# Altium PCB Mini_CS.PcbDoc
Units mm, origin at the board's own origin, x right, y up, seen from the top; angles counter-clockwise.
Board outline 22.1 x 55.3 mm, 4 copper layers (Top Layer, Ground Plane, Power Plane, Bottom Layer), stack 0.778 mm thick; 50 components, 60 nets, 288 pads, 86 vias.
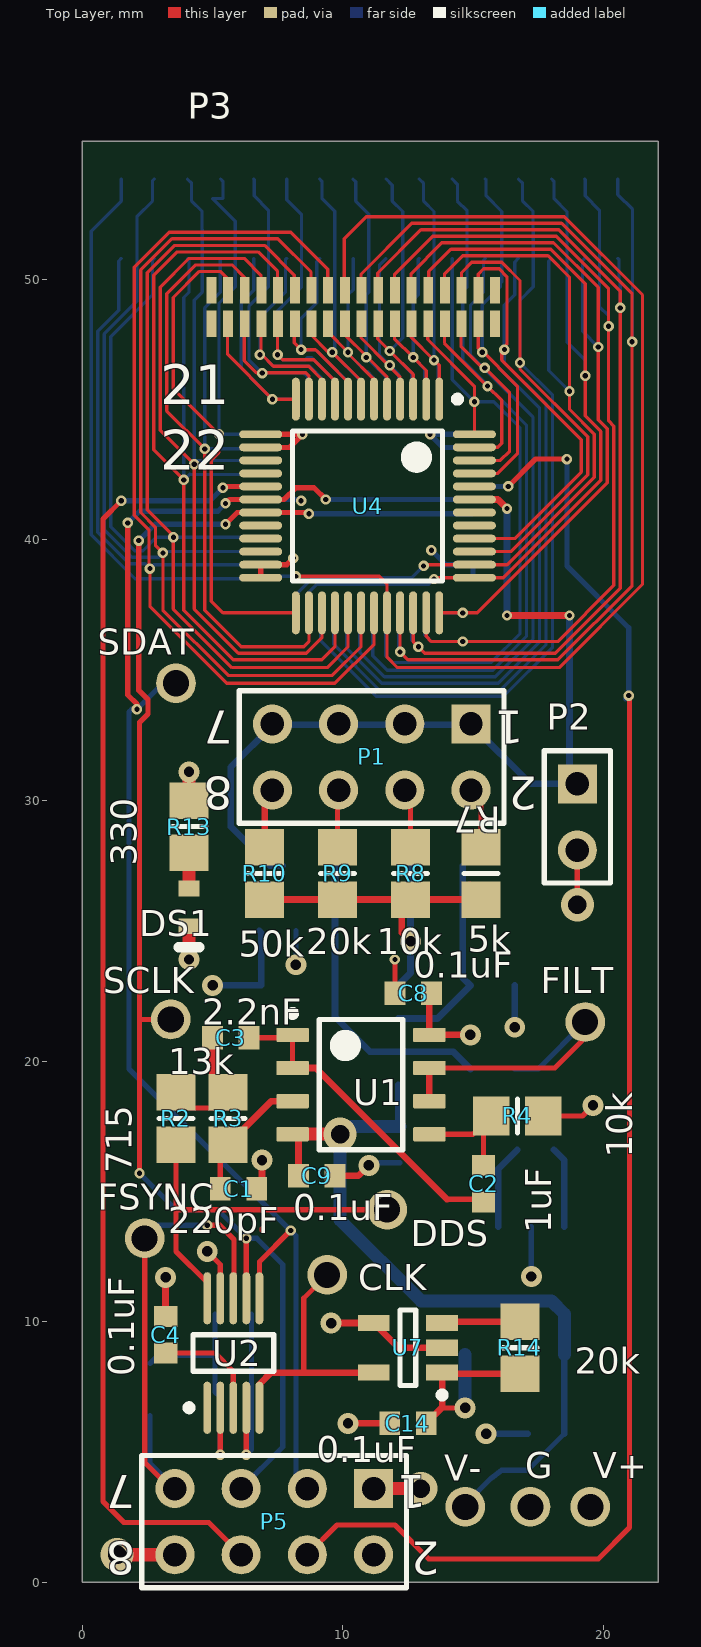
[diagram p0: Top Layer view]
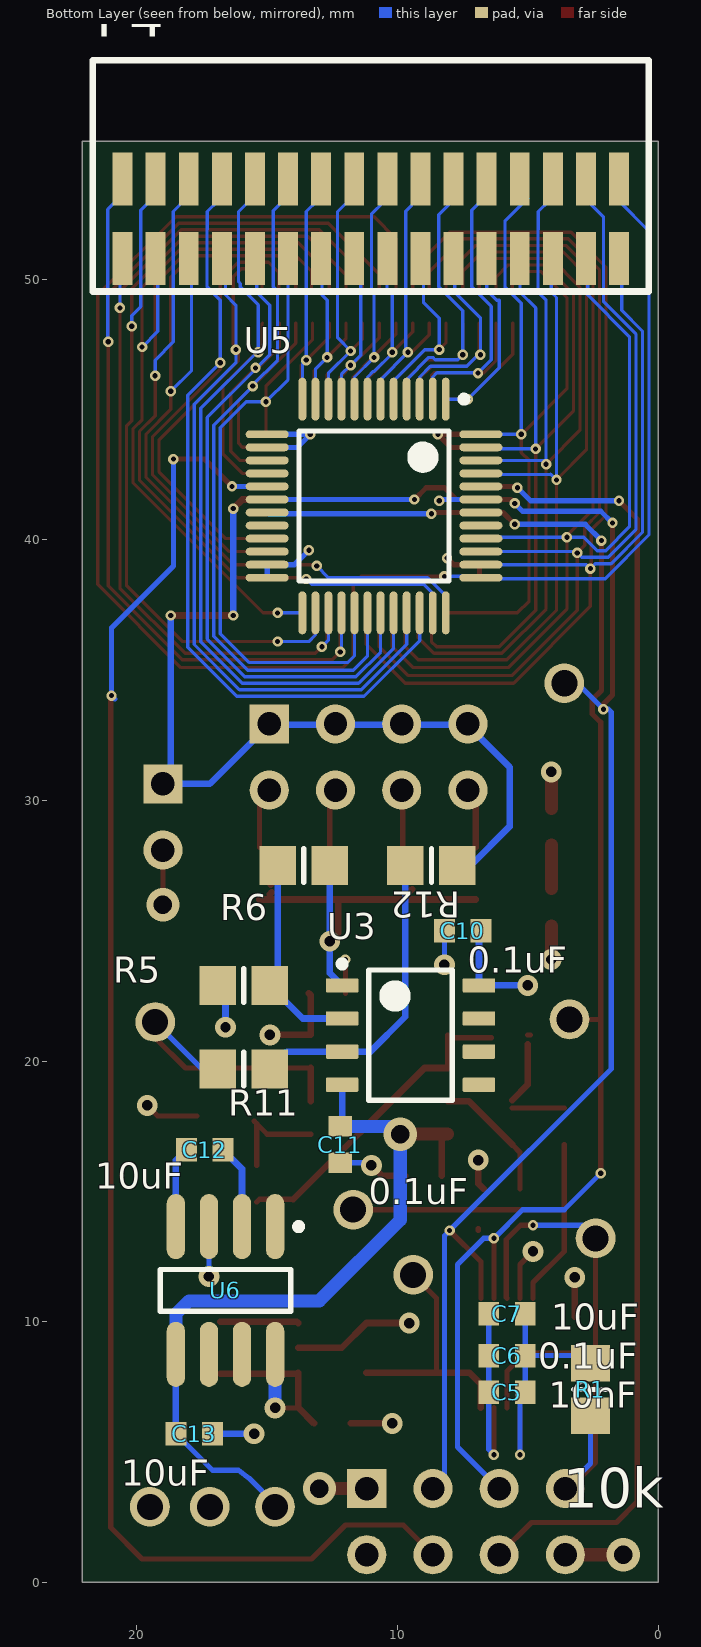
[diagram p1: Bottom Layer view, seen from below]
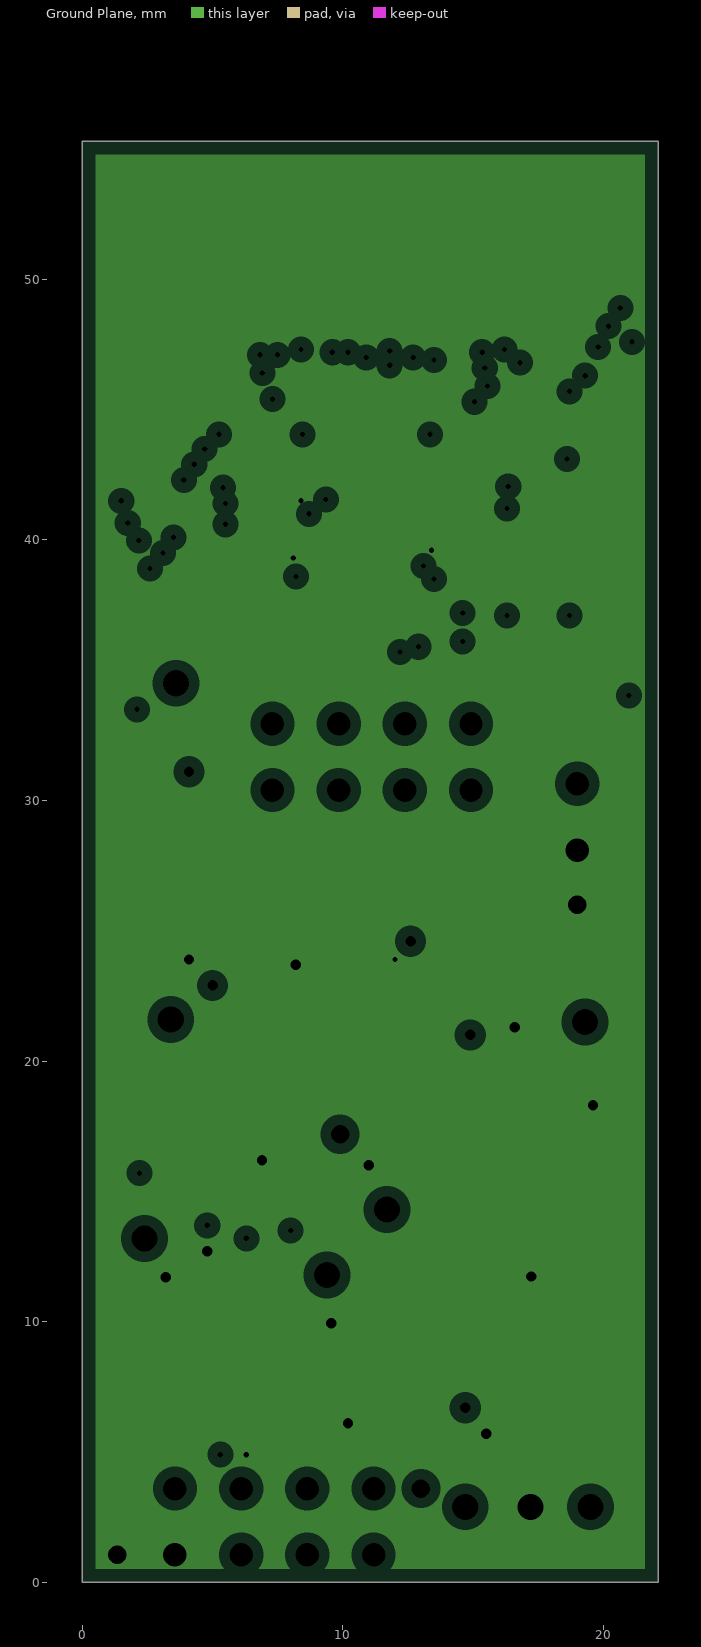
[diagram p2: Ground Plane, clearances drawn from the general rule]
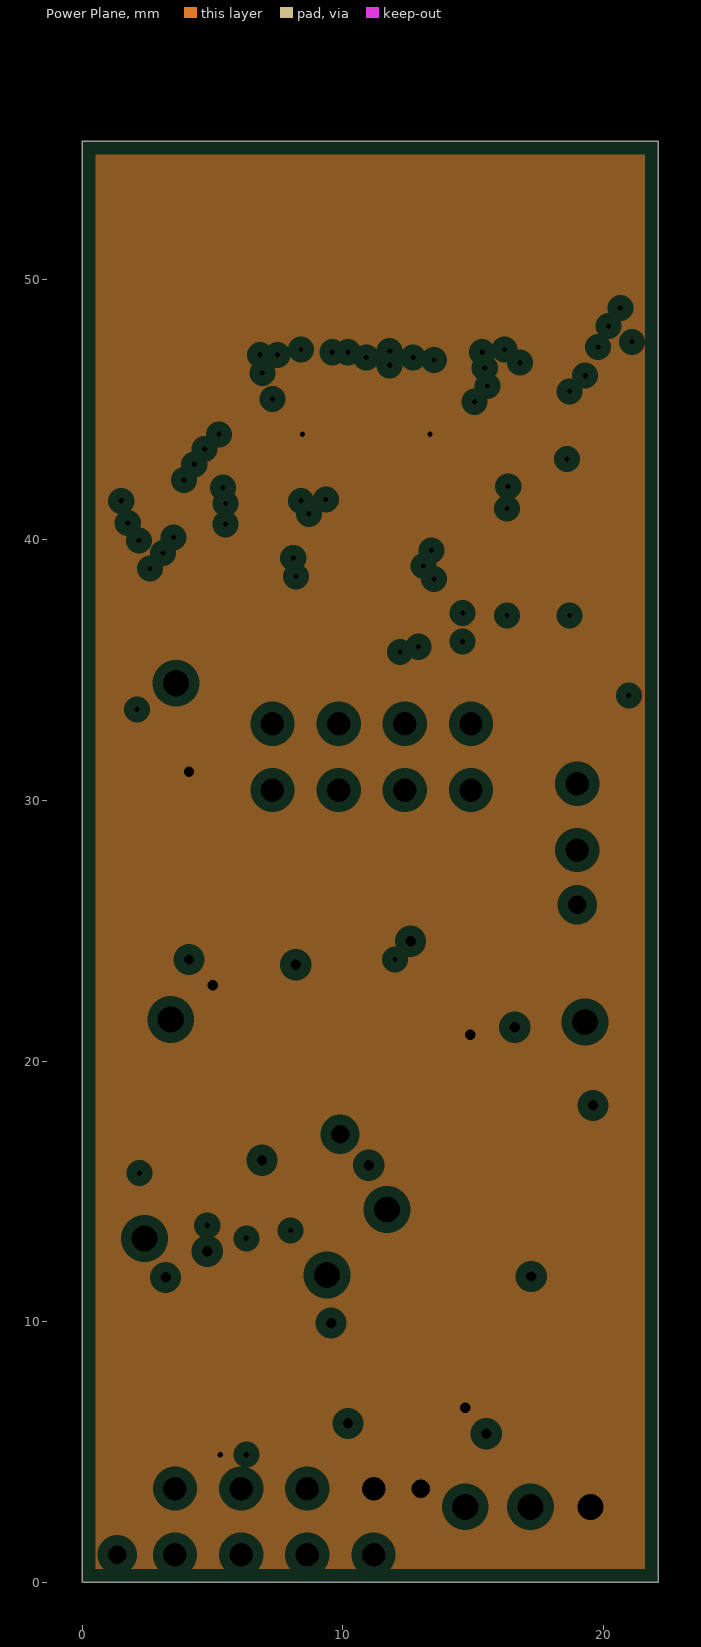
[diagram p3: Power Plane, clearances drawn from the general rule]

## Layer stack, top to bottom
Top Solder: solder mask 0.0102, Solder Resist, Dk 3.5
Top Layer: signal copper 0.0356
Dielectric 1: core 0.254, FR-4, Dk 4.2
Ground Plane: plane copper 0.036, net GND
Dielectric 3: prepreg 0.127, Dk 4.2
Power Plane: plane copper 0.036, net V+
Dielectric 2: core 0.254, Dk 4.2
Bottom Layer: signal copper 0.0356
Bottom Solder: solder mask 0.0102, Solder Resist, Dk 3.5

## Board outline
22.1,55.3 0,55.3 0,0 22.1,0

## Design rules (kind name [scope] priority, off if disabled: settings)
Clearance [All] p1: gap=0.125 ignorepadtopadclearanceinfootprint=FALSE except(0: Arc-Hole Track-Hole SMDPad-Hole THPad-Hole Via-Hole Fill-Hole Poly-Hole Region-Hole Text-Hole)
PlaneClearance [All] p1: clearance=0.4
PlaneConnect [All] p1: planeconnectstyle=Direct reliefexpansion=0.508 reliefentries=4 reliefconductorwidth=0.254 reliefairgap=0.254
PolygonConnect [All] p1: connectstyle=Relief reliefconductorwidth=0.254 reliefentries=4 polygonreliefangle="90 Angle" airgapwidth=0.254
RoomDefinition Power_Supply_and_Buttons [InComponentClass('Power_Supply_and_Buttons')] p1: confinementstyle=ConfineIn formatcopy=TRUE lockcomponents=FALSE outline 24.343,39.394 81.493,39.394 81.493,51.713 24.343,51.713
RoomDefinition adg731-switches [InComponentClass('adg731-switches')] p2: confinementstyle=ConfineIn formatcopy=TRUE lockcomponents=FALSE outline 24.343,30.6 30,30.6 30,38.124 24.343,38.124
RoomDefinition AD9833_Single_Ended [InComponentClass('AD9833_Single_Ended')] p3: confinementstyle=ConfineIn formatcopy=TRUE lockcomponents=FALSE outline -21.061,-5.4 -16.5,-5.4 -16.5,-2.098 -21.061,-2.098
RoutingVias [All] p1: holewidth=0.4 width=0.8 viastyle="Through Hole" minholewidth=0.2 minwidth=0.4 maxholewidth=0.711 maxwidth=1.27
SolderMaskExpansion [All] p1: expansion=0.102
Width [All] p1: maxlimit=0.5 minlimit=0.125 preferedwidth=0.2
28 further rules are at their usual default settings.

## Classes and differential pairs
net class SYNC[1..2]: SYNC1 SYNC2
component class Power_Supply_and_Buttons: C12 C13 C14 DS1 G P5 R13 R14 TP8 TP11 TP13 U6 U7 V+ V-
component class adg731-switches: P3 P4 U4 U5
component class AD9833_Single_Ended: C1 C2 C3 C4 C5 C6 C7 C8 C9 C10 C11 CLK DDS FILT FSYNC P1 P2 R1 R2 R3 R4 R5 R6 R7 R8 R9 R10 R11 R12 SCLK SDAT TP1 TP2 TP3 TP4 TP5 TP6 U1 U2 U3

## Components (designator, comment, footprint, x,y, rotation, side; value= is the part's Value field where it differs from the comment)
C1 "220pF" 1608[0603] 6,15.1 r180 top
C2 "1uF" 1608[0603] 15.4,15.3 r90 top
C3 "2.2nF" 1608[0603] 5.7,20.9 r180 top
C4 "0.1uF" 1608[0603] 3.2,9.5 r270 top
C5 "10nF" 1608[0603] 5.8,7.3 r180 bottom
C6 "0.1uF" 1608[0603] 5.8,8.7 r180 bottom
C7 "10uF" 1608[0603] 5.8,10.3 r180 bottom
C8 "0.1uF" 1608[0603] 12.7,22.6 r0 top
C9 "0.1uF" 1608[0603] 9,15.6 r180 top
C10 "0.1uF" 1608[0603] 7.5,25 r180 bottom
C11 "0.1uF" 1608[0603] 12.2,16.8 r90 bottom
C12 "10uF" 1608[0603] 17.4,16.6 r180 bottom
C13 "10uF" 1608[0603] 17.8,5.7 r0 bottom
C14 "0.1uF" 1608[0603] 12.5,6.1 r0 top
CLK "TESTPOINT_WHITE" TestPointVia 9.4,11.8 r180 top
DDS "TESTPOINT_WHITE" TestPointVia 11.7,14.3 r180 top
DS1 "TLMS1100-GS08" VISH-TLMX1100_V 4.1,25.9 r270 top
FILT "TESTPOINT_WHITE" TestPointVia 19.3,21.5 r180 top
FSYNC "TESTPOINT_WHITE" TestPointVia 2.4,13.2 r90 top
G "TESTPOINT_WHITE" TestPointVia 17.2,2.9 r90 top
P1 "Header 4X2" HDR2X4 14.92,32.94 r180 top
P2 "Header 2" HDR1X2 19,30.64 r270 top
P3 "MHDR2X18" A79025-001 4.96,48.3 r0 top
P4 "Header 16X2" FTSH-117-XX-XXX-DH 10.39,56.642 r180 bottom
P5 "Header 4X2" HDR2X4 11.18,3.6 r180 top
R1 "10k" 6-0805_M 2.6,7.4 r90 bottom
R2 "715" 6-0805_M 3.6,17.8 r90 top
R3 "13k" 6-0805_M 5.6,17.8 r270 top
R4 "10k" 6-0805_M 16.7,17.9 r180 top
R5 "0.1%" 6-0805_M 15.9,22.9 r180 bottom value=100K
R6 "0.1%" 6-0805_M 13.6,27.5 r180 bottom value=100K
R7 "5k" 6-0805_M 15.3,27.2 r270 top value=50k
R8 "10k" 6-0805_M 12.6,27.2 r90 top value=20k
R9 "20k" 6-0805_M 9.8,27.2 r90 top value=10k
R10 "50k" 6-0805_M 7,27.2 r90 top value=5k
R11 "0.1%" 6-0805_M 15.9,19.7 r180 bottom value=100K
R12 "0.1%" 6-0805_M 8.7,27.5 r180 bottom value=100K
R13 "330" 6-0805_M 4.1,29 r90 top
R14 "20k" 6-0805_M 16.8,9 r90 top
SCLK "TESTPOINT_WHITE" TestPointVia 3.4,21.6 r180 top
SDAT "TESTPOINT_WHITE" TestPointVia 3.6,34.5 r180 top
U1 "OPA2188AIDR" D0008A_L 10.7,19.1 r0 top
U2 "AD9833BRMZ" ADI-RM-10_M 5.8,8.8 r90 top
U3 "OPA2188AIDR" D0008A_L 9.5,21 r180 bottom
U4 "ADG731BSUZ" ADI-SU-48_N 10.95,41.3 r270 top
U5 "ADG731BSUZ" ADI-SU-48_N 10.9,41.3 r270 bottom
U6 "LTC1044ACS8" LT-S8-8_M 16.6,11.2 r270 bottom
U7 "LTC6900IS5#PBF" LT-TSOT-23-5_V 12.5,9 r180 top
V+ "TESTPOINT_WHITE" TestPointVia 19.5,2.9 r90 top
V- "TESTPOINT_WHITE" TestPointVia 14.7,2.9 r90 top

## Footprints (in the part's own frame and the unit in brackets; to place one, negate y for a bottom-side part, rotate by r counter-clockwise, add the part's x,y. Pads: shape width x height; smd on the part's side, far side on the other; paste and mask are expansions set on the pad)
6-0805_M [mm] "Chip Resistor, Body 2.0x1.2mm, IPC Low Density"
  rect 1.4x1.5 smd: 1(-1,0) 2(1,0)
  silkscreen extent 0,-0.65 0,0.65, body extent -1.07,-0.7 1.07,0.7, height 0.7
1608[0603] [mm] "Chip Capacitor, Body 1.6x0.8mm, IPC High Density"
  rect 0.8x0.9 smd: 1(-0.7,0) 2(0.7,0)
  body extent -0.87,-0.48 0.87,0.48, height 1.3
A79025-001 [mm]
  rect 0.38x1.02 smd: 1(0,0) 2(0.64,0) 3(1.28,0) 4(1.92,0) 5(2.56,0) 6(3.2,0) 7(3.84,0) 8(4.48,0) 9(5.12,0) 10(5.76,0) 11(6.4,0) 12(7.04,0) 13(7.68,0) 14(8.32,0) 15(8.96,0) 16(9.6,0) 17(10.24,0) 18(10.88,0) 19(0,1.28) 20(0.64,1.28) 21(1.28,1.28) 22(1.92,1.28) 23(2.56,1.28) 24(3.2,1.28) 25(3.84,1.28) 26(4.48,1.28) 27(5.12,1.28) 28(5.76,1.28) 29(6.4,1.28) 30(7.04,1.28) 31(7.68,1.28) 32(8.32,1.28) 33(8.96,1.28) 34(9.6,1.28) 35(10.24,1.28) 36(10.88,1.28)
  body extent -1.1,-0.29 11.98,7.15, height 1.9
ADI-RM-10_M [mm] "TSSOP, 10-Leads, Body 3x3mm, Pitch 0.5mm, IPC Low Density"
  oval 2x0.3 smd: 1(-2.1,1) 2(-2.1,0.5) 3(-2.1,0) 4(-2.1,-0.5) 5(-2.1,-1) 6(2.1,-1) 7(2.1,-0.5) 8(2.1,0) 9(2.1,0.5) 10(2.1,1)
  silkscreen extent -2.22,-1.55 0.7,1.82, body extent -1.55,-1.55 1.55,1.55, height 1.1
ADI-SU-48_N [mm] "QFP, 48-Leads, Body 7x7mm, Pitch 0.5mm, IPC Medium Density"
  oval 1.65x0.3 smd: 1(-4.1,2.75) 2(-4.1,2.25) 3(-4.1,1.75) 4(-4.1,1.25) 5(-4.1,0.75) 6(-4.1,0.25) 7(-4.1,-0.25) 8(-4.1,-0.75) 9(-4.1,-1.25) 10(-4.1,-1.75) 11(-4.1,-2.25) 12(-4.1,-2.75) 25(4.1,-2.75) 26(4.1,-2.25) 27(4.1,-1.75) 28(4.1,-1.25) 29(4.1,-0.75) 30(4.1,-0.25) 31(4.1,0.25) 32(4.1,0.75) 33(4.1,1.25) 34(4.1,1.75) 35(4.1,2.25) 36(4.1,2.75)
  oval 0.3x1.65 smd: 13(-2.75,-4.1) 14(-2.25,-4.1) 15(-1.75,-4.1) 16(-1.25,-4.1) 17(-0.75,-4.1) 18(-0.25,-4.1) 19(0.25,-4.1) 20(0.75,-4.1) 21(1.25,-4.1) 22(1.75,-4.1) 23(2.25,-4.1) 24(2.75,-4.1) 37(2.75,4.1) 38(2.25,4.1) 39(1.75,4.1) 40(1.25,4.1) 41(0.75,4.1) 42(0.25,4.1) 43(-0.25,4.1) 44(-0.75,4.1) 45(-1.25,4.1) 46(-1.75,4.1) 47(-2.25,4.1) 48(-2.75,4.1)
  silkscreen extent -4.22,-2.88 2.88,3.57, body extent -3.5,-3.5 3.5,3.5, height 1.2
D0008A_L [mm] "SOIC, 8-Leads, Body 5x4mm, Pitch 1.27mm, IPC High Density"
  rrect18% 1.25x0.55 smd: 1(-2.625,1.905) 2(-2.625,0.635) 3(-2.625,-0.635) 4(-2.625,-1.905) 5(2.625,-1.905) 6(2.625,-0.635) 7(2.625,0.635) 8(2.625,1.905)
  silkscreen extent -2.75,-2.5 1.6,2.85, body extent -3,-2.45 3,2.45, height 1.63
FTSH-117-XX-XXX-DH [mil]
  rect 30x80 smd mask+2: 1(-400,-230) 2(-400,-110) 3(-350,-230) 4(-350,-110) 5(-300,-230) 6(-300,-110) 7(-250,-230) 8(-250,-110) 9(-200,-230) 10(-200,-110) 11(-150,-230) 12(-150,-110) 13(-100,-230) 14(-100,-110) 15(-50,-230) 16(-50,-110) 17(0,-230) 18(0,-110) 19(50,-230) 20(50,-110) 21(100,-230) 22(100,-110) 23(150,-230) 24(150,-110) 25(200,-230) 26(200,-110) 27(250,-230) 28(250,-110) 29(300,-230) 30(300,-110) 31(350,-230) 32(350,-110)
  silkscreen extent -445,-280 395,70
HDR1X2 [mm] "Connector; Header; 2 Position"
  rect 1.5x1.5 hole 0.9: 1(0,0)
  round 1.5 hole 0.9: 2(2.54,0)
  silkscreen extent -1.27,-1.27 3.81,1.27
HDR2X4 [mm] "Connector; Header; 4x2 Position"
  rect 1.5x1.5 hole 0.9: 1(0,0)
  round 1.5 hole 0.9: 2(0,2.54) 3(2.54,0) 4(2.54,2.54) 5(5.08,0) 6(5.08,2.54) 7(7.62,0) 8(7.62,2.54)
  silkscreen extent -1.27,-1.27 8.89,3.81
LT-S8-8_M [mm] "SOIC, 8-Leads, Body 5x4mm, Pitch 1.27mm, IPC Low Density"
  oval 2.5x0.7 smd: 1(-2.45,1.905) 2(-2.45,0.635) 3(-2.45,-0.635) 4(-2.45,-1.905) 5(2.45,-1.905) 6(2.45,-0.635) 7(2.45,0.635) 8(2.45,1.905)
  silkscreen extent -2.57,-2.5 0.8,2.93, body extent -2,-2.5 2,2.5, height 1.76
LT-TSOT-23-5_V [mm] "SOT23, 5-Leads, Body 2.90x1.75mm, Pitch 0.95mm"
  rect 1.22x0.62 smd: 1(-1.31,0.95) 2(-1.31,0) 3(-1.31,-0.95) 4(1.31,-0.95) 5(1.31,0.95)
  silkscreen extent -1.44,-1.45 0.3,1.93, body extent -1.4,-1.45 1.4,1.45, height 1
TestPointVia [mil]
  round 60 hole 39.37: 1(0,0)
VISH-TLMX1100_V [mm] "SMD, 2-Leads, Body 1.6x0.8mm"
  rect 0.6x0.8 smd: 1(-0.725,0) 2(0.725,0)
  silkscreen extent 1.53,-0.4 1.53,0.4, body extent -0.8,-0.4 0.8,0.4, height 0.65

## Part data
C1 C2 C3 C4 C5 C6 C7 C8 C9 C10 C11 C12 C13 C14: library part "Cap Semi", "Capacitor (Semiconductor SIM Model)", LatestRevisionDate=29-May-2009, LatestRevisionNote="IPC-7351 Footprint Added.", PackageDescription="Chip Capacitor", PackageReference=C1206, Published=8-Jun-2000, Publisher="Altium Limited"
DS1: library part CMP-1666-00027-1, "LED, RED, 2.1 V, -40 to 100 degC, 2-Pin SMD (0603), RoHS, Tape and Reel", Capacitance="12 pF", Case/Package=0603, Case Code (Metric)=1608, Max Operating Temperature=125degC, Min Operating Temperature=-55degC, Package Quantity=4000, Resistance="100000000000 Ohm", Tolerance=5%, Type (Capacitors)=C0G, Voltage Rating="50 V", Case Code (Imperial)=0603, ComponentLink1Description="Manufacturer URL", ComponentLink1URL=http://www.vishay.com/, ComponentLink2Description=Datasheet, ComponentLink2URL=http://www.vishay.com/docs/83173/tlmb1100.pdf, DatasheetVersion="Rev. 2.7, 03/2016", Height="0.8 mm", Length="1.6 mm", Mount="Surface Mount", PackageDescription="2-Pin Surface Mount Device, Body 1.6 x 0.8 mm", PackageReference=TLMX1100, Packaging="Tape and Reel", Pins=2, Radiation Hardening=No, REACH SVHC="No SVHC", RoHSCompliant=True, Voltage Rating (DC)="50 V", Width="0.8 mm"
P1 P5: "Header, 4-Pin, Dual row", LatestRevisionDate=17-Jul-2002, LatestRevisionNote="Re-released for DXP Platform.", Publisher="Altium Limited"
P2: "Header, 2-Pin", LatestRevisionDate=17-Jul-2002, LatestRevisionNote="Re-released for DXP Platform.", Publisher="Altium Limited"
P3: "Header, 18-Pin, Dual row", LatestRevisionDate=17-Jul-2002, LatestRevisionNote="Re-released for DXP Platform.", Publisher="Altium Limited"
P4: "Header, 16-Pin, Dual row", LatestRevisionDate=17-Jul-2002, LatestRevisionNote="Re-released for DXP Platform.", Publisher="Altium Limited"
R1 R2 R3 R4 R5 R6 R7 R8 R9 R10 R11 R12 R13 R14: library part Res1, "Resistor", LatestRevisionDate=17-Jul-2002, LatestRevisionNote="Re-released for DXP Platform.", PackageDescription="Axial Device, Thru-Hole; 2 Leads; 0.3 in Pin Spacing", PackageReference=AXIAL-0.3, Published=8-Jun-2000, Publisher="Altium Limited"
U1 U3: library part CMP-0272-00241-3, "0.03 uV/degC, 6 uV Vos, Low Noise, Rail-to-Rail Output, Zero-Drift Operational Amplifier, 4 to 36 V, -40 to 105 degC, 8-pin SOIC (D8), Green (RoHS & no Sb/Br)", Manufacturer="Texas Instruments", Rating=Catalog, Total Supply Voltage(Max)(+5V is 5, +/-5V is 10)=36, Total Supply Voltage(Min)(+5V is 5, +/-5V is 10)=4, CMRR(Min)(dB)=120, Code_JEDEC=MS-012, ComponentLink1Description="Manufacturer URL", ComponentLink1URL=http://www.ti.com/, ComponentLink2Description=Datasheet, ComponentLink2URL=http://www.ti.com/lit/ds/symlink/opa2188.pdf, ComponentLink3Description="Package Specification", ComponentLink3URL=http://www.ti.com/litv/pdf/msoi002j, DatasheetVersion=SBOS525B, Eco-Plan="Green (RoHS & no Sb/Br)", GBW(Typ)(MHz)=2, IIB(Max)(pA)=850, Iq per channel(Max)(mA)=0.475, Mounting Technology="Surface Mount", Number of Channels=2, Offset Drift(Typ)(uV/C)=0.03, PackageDescription="8-Pin Plastic Small Outline, Body 4.9 x 3.9 mm, Pitch 1.27 mm", PackageReference=D0008A, PackageVersion="4040047-3/M, 06/2011", Packing="LARGE T&R", PartId=1, PartNumber=OPA2188AIDR, Slew Rate(Typ)(V/us)=0.8, Sub Family="High Supply Voltage Amplifier (>=30V), Low Noise Amp (<=10nV/rtHz), Low Offset Voltage Amplifier (<=500uV), Low Power Amp (<=500uA), Precision Amplifier, Zero Drift Precision Amplifier", Vio (25C)(Max)(mV)=0.025
U2: library part CMP-0293-00077-1, "Low Power, 12.65 mW, 2.3 V to 5.5 V, Programmable Waveform Generator, 10-Bit, Serial, RM-10, 50 Tube, Pb-Free", Code_JEDEC=MO-187-BA, Compliance Range (V)=650mV, ComponentLink1Description="Manufacturer URL", ComponentLink1URL=www.analog.com, ComponentLink2Description=Datasheet, ComponentLink2URL=http://www.analog.com/static/imported-files/data_sheets/AD9833.pdf, ComponentLink3Description="Package Specification", ComponentLink3URL=http://www.analog.com/static/imported-files/packages/PKG_PDF/MSOP%28RM%29/RM_10.pdf, DatasheetVersion="Rev. D", FS Iout (mA nom)=3mA, I/O Interface=Serial, I Supply total (max)=5.5mA, Master fclk=25MHz, PackageDescription="10-Lead Mini Small Outline Package [MSOP]", PackageReference=RM-10, PackageVersion=5/8/2005, REFCLK Multiplier=No, Resolution (Bits)=10bit, Tuning Word Width (bits)=28bit
U4 U5: library part CMP-0798-00240-1, "1.8 to 5.5 V / +/-2.5 V, 4 Ohm, Serially Controlled, 32-Channel Analog Multiplexer, -40 to 85 degC, 48-pin QFP (SU-48), Tray", Manufacturer="Analog Devices", Bandwidth (Hz)=18M, Code_JEDEC=MS-026ABC, ComponentLink1Description="Manufacturer URL", ComponentLink1URL=http://www.analog.com/en/index.html, ComponentLink2Description=Datasheet, ComponentLink2URL=http://www.analog.com/static/imported-files/data_sheets/ADG725_731.pdf, ComponentLink3Description="Package Specification", ComponentLink3URL=http://www.analog.com/static/imported-files/packages/470644706845302410119987SU48_7x7.pdf, DatasheetVersion="Rev. A", Max Analog Signal Range="Vss to Vdd", Mounting Technology="Surface Mount", PackageDescription="48-Pin Thin Plastic Quad Flat Package, Body 7 x 7 mm, Pitch 0.5 mm", PackageReference=SU-48, Packing=Tray, PartNumber=ADG731BSUZ, Ron (ohms)=4, Supply V Guar Performance="Dual_(+/-2.5V), Single_(+3V), Single_(+5V)", t transition (s)=42n
U6: library part CMP-0475-00491-1, "12 V CMOS Voltage Converter, 8-pin SOIC (S8-8), 0 to 70 degC", Frequency(kHz)=5, Manufacturer="Linear Technology", ComponentLink1Description="Manufacturer URL", ComponentLink1URL=http://www.linear.com/, ComponentLink2Description=Datasheet, ComponentLink2URL=http://cds.linear.com/docs/en/datasheet/lt1044a.pdf, ComponentLink3Description="Package Specification", ComponentLink3URL=http://cds.linear.com/docs/en/packaging/05081610_G_SO8.pdf, DatasheetVersion="Rev. 0", Isupply(mA)=0.2, Max Iout(mA)=20, Mounting Technology="Surface Mount", PackageDescription="8-Pin Plastic Small Outline (Narrow .150 Inch), Body 4.9 x 3.9 mm, Pitch 1.27 mm", PackageReference=S8-8, PackageVersion="Rev. G, 03/2012", PartNumber=LTC1044ACS8, RoHS=FALSE, Vin Max(V)=12, Vin Min(V)=1.5, Voutput="2Vin, -Vin, 0.5Vin"
U7: library part CMP-2000-06612-1, "Low Power, Resistor Set Oscillator, 1 KHz to 20 MHz, 2.7 to 5.5 V, -40 to 85 degC, 5-Pin SOT-23 (S5), Pb-Free", Digital IC Case Style=SOT-23, Frequency=20MHz, Manufacturer="Linear Technology", Operating Temperature Max=85°C, Operating Temperature Min=-40°C, Operating Temperature Range=-40°Cto+85°C, Package Description="5-Pin Small Outline Transistor, Body 2.9 x 1.625 mm, Pitch 0.95 mm", Package Reference=TSOT23-5, Supply Voltage Max=5.5V, Supply Voltage Min=2.7V, Supply Voltage Range=2.7Vto5.5V, Base Number=6900, Clock External Input=No, Datasheet URL=http://cds.linear.com/docs/en/datasheet/6900fa.pdf, Datasheet Version="Rev. A, 07/2009", Manufacturer URL=http://www.linear.com/, Mounting Technology=SurfaceMount, MSL=MSL1-Unlimited, No. of Pins=5, Operating Frequency Max=20MHz, Package / Case=SOT-23, SVHC=NoSVHC(19-Dec-2012), Termination Type=SMD

## Via types
v1: diameter 0.4, hole 0.2, Top Layer to Bottom Layer, 65 vias
v2: diameter 0.8, hole 0.4, Top Layer to Bottom Layer, 17 vias
v3: diameter 1.27, hole 0.711, Top Layer to Bottom Layer, 4 vias

## Nets (pads, with @x,y where several pads share a name; then routed paths per layer and width w, separated by ;. In a path a pad name is that pad's centre, name@x,y a point inside that pad or via, vN(x,y) a via of type N, cw(c..) or ccw(c..) an arc to the next point about the centre after c; other vN are vias at no path point)
DDS_CLK: CLK.1 U2.5 U7.5 | length 9.6
  Top Layer w0.2: 8.5,8.05 8.5,10.9 CLK.1
  Top Layer w0.254: U2.5 6.8,7.6 7.25,8.05 8.5,8.05 U7.5
DDS_FILT_OUT: FILT.1 R11.1 U1.6 U1.7 | length 11.8
  Top Layer w0.2: U1.7 18.135,19.735 19.3,20.9 FILT.1
  Top Layer w0.254: U1.6 U1.7
  Bottom Layer w0.2: R11.1@16.6,19.7 17.5,19.7 FILT.1
DDS_OUT: DDS.1 R2.1 U2.10 | length 14.4
  Top Layer w0.2: R2.1 3.6,12.7 4.8,11.5 U2.10 ; 3.7,14.3 DDS.1
E1: P3.2 P4.23 U4.12 U5.1 | length 11.5
  Top Layer w0.125: P3.2@5.58,48.32 5.58,47.12 v1(7.3,45.4) U4.12
  Bottom Layer w0.125: P4.23 6.58,49.58 6.196,49.196 6.1,49.196 6.1,46.6 v1(7.3,45.4) U5.1
E2: P3.3 P4.24 U4.11 U5.2 | length 15.9
  Top Layer w0.125: P3.3@6.22,48.32 6.22,46.88 6.687,46.413 v1@6.9,46.413 ; v1(6.913,46.4) v1@6.9,46.413 ; U4.11 8.7,46.3 8.588,46.412 8.34,46.412 v1@6.9,46.413
  Bottom Layer w0.125: P4.24 6.6,53.828 6.6,53.2 7.149,52.651 7.149,49.706 6.4,48.958 6.4,46.912 v1(6.913,46.4) 6.925,46.413 8.29,46.413 8.488,46.412 8.65,46.25 U5.2
E3: P3.4 P4.21 U4.10 U5.3 | length 12.4
  Top Layer w0.125: P3.4@6.86,48.32 6.86,47.14 v1(6.82,47.1) 6.9,47.1 7.337,46.663 8.443,46.663 8.691,46.662 9.2,46.154 U4.10
  Bottom Layer w0.125: P4.21 7.8,50.75 7.8,49.5 6.82,48.52 v1(6.82,47.1) 6.9,47.1 7.337,46.663 8.393,46.663 8.738,46.662 9.15,46.25 U5.3
E4: P3.5 P4.22 U4.9 U5.4 | length 15.3
  Top Layer w0.125: P3.5@7.5,48.32 v1(7.5,47.1) 7.687,46.913 8.547,46.913 8.887,46.912 9.7,46.1 U4.9
  Bottom Layer w0.125: P4.22 7.85,53.05 8.419,52.481 8.419,49.706 7.5,48.788 v1(7.5,47.1) 7.687,46.913 8.497,46.913 8.561,46.912 8.648,47 8.8,47 9.65,46.15 U5.4
E5: P3.6 P4.19 U4.8 U5.5 | length 10.8
  Top Layer w0.125: P3.6@8.14,48.32 8.14,47.56 v1(8.4,47.3) ; v1(8.4,47.3) 8.952,47.3 9.012,47.24 9.439,46.812 10.2,46.052 U4.8
  Bottom Layer w0.125: P4.19 9,50.68 9,49.1 8.4,48.5 v1(8.4,47.3) 8.952,47.3 9.012,47.24 9.439,46.812 10.15,46.102 U5.5
E6: P3.7 P4.20 U4.7 U5.6 | length 13
  Top Layer w0.125: P3.7@8.78,48.32 8.78,47.87 9.45,47.2 v1(9.6,47.2) 10.7,46.1 U4.7
  Bottom Layer w0.125: P4.20 9.2,53.768 9.2,53.1 9.689,52.611 9.689,47.288 v1(9.6,47.2) 10.65,46.15 U5.6
E7: P3.8 P4.17 U4.6 U5.7 | length 9.6
  Top Layer w0.125: P3.8@9.42,48.32 9.42,47.98 v1(10.2,47.2) 10.2,47.152 11.2,46.152 U4.6
  Bottom Layer w0.125: P4.17 10.4,50.79 10.4,49.596 10.2,49.396 v1(10.2,47.2) 10.2,47.152 10.888,46.464 10.936,46.464 11.15,46.25 U5.7
E8: P3.9 P4.18 U4.5 U5.8 | length 12.7
  Top Layer w0.125: P3.9@10.06,48.32 10.06,47.888 v1@10.948,47 ; v1(10.9,47) v1@10.948,47 ; U4.5 11.7,46.248 v1@10.948,47
  Bottom Layer w0.125: P4.18 10.5,53.738 10.5,53 11,52.5 11,49.5 10.9,49.4 v1(10.9,47) 11.65,46.25 U5.8
E9: P3.10 P4.15 U4.4 U5.9 | length 9.4
  Top Layer w0.125: P3.10@10.7,48.32 10.7,47.748 v1@11.748,46.7 ; v1@11.7,46.7 v1@11.748,46.7 ; v1(11.8,46.7) v1@11.748,46.7 ; U4.4 12.2,46.248 v1@11.748,46.7
  Bottom Layer w0.125: P4.15 11.412,50.552 11.412,47.088 v1(11.8,46.7) 12.15,46.35 U5.9
E10: P3.11 P4.16 U4.3 U5.10 | length 12.8
  Top Layer w0.125: P3.11@11.34,48.32 11.34,47.708 v1(11.8,47.248) 12.7,46.348 U4.3
  Bottom Layer w0.125: P4.16 11.9,53.608 11.9,53 12.3,52.6 12.3,47.748 v1(11.8,47.248) 12.65,46.398 U5.10
E11: P3.12 P4.13 U4.2 U5.11 | length 9.1
  Top Layer w0.125: P3.12@11.98,48.32 11.98,47.72 v1(12.7,47) 13.2,46.5 U4.2
  Bottom Layer w0.125: P4.13 12.9,50.77 12.9,49.4 12.7,49.2 v1(12.7,47) 13.15,46.55 U5.11
E12: P3.13 P4.14 U4.1 U5.12 | length 12.1
  Top Layer w0.125: P3.13@12.62,48.32 12.62,47.78 v1(13.5,46.9) 13.7,46.7 U4.1
  Bottom Layer w0.125: P4.14 13.1,53.678 13.1,53 13.5,52.6 v1(13.5,46.9) 13.65,46.75 U5.12
E13: P3.14 P4.11 U4.48 U5.29 | length 28.3
  Top Layer w0.125: P3.14@13.26,48.32 13.26,47.688 15.05,45.898 v1(15.05,45.3) U4.48
  Bottom Layer w0.125: U5.29 11.65,35.55 11.9,35.3 15.7,35.3 16.8,36.4 16.8,44.3 15.8,45.3 v1(15.05,45.3) 14.2,46.15 P4.11
E14: P3.15 P4.12 U4.47 U5.30 | length 33.8
  Top Layer w0.125: P3.15@13.9,48.32 13.9,47.552 v1(15.552,45.9) 16.1,45.352 16.1,43.7 15.95,43.55 U4.47
  Bottom Layer w0.125: U5.30 11.15,35.55 11.7,35 15.754,35 17.05,36.296 17.05,44.404 15.904,45.55 15.902,45.55 v1(15.552,45.9) 15.552,45.948 14.6,46.9 14.6,49.538 14.769,49.706 14.769,52.631 14.4,53 14.4,53.648 P4.12
E15: P3.16 P4.9 U4.46 U5.31 | length 32.3
  Top Layer w0.125: P3.16@14.54,48.32 14.54,47.412 15.352,46.6 v1(15.448,46.6) 16.4,45.648 16.4,43.4 16.05,43.05 U4.46
  Bottom Layer w0.125: U5.31 10.65,35.696 11.596,34.75 15.857,34.75 17.3,36.193 17.3,44.7 15.448,46.552 v1(15.448,46.6) 15.4,46.6 14.9,47.1 14.9,49 15.4,49.5 15.4,50.73 P4.9
E16: P3.17 P4.10 U4.45 U5.32 | length 37.1
  Top Layer w0.125: U4.45 15.95,42.55 16.7,43.3 16.7,45.896 15.248,47.348 15.2,47.348 ; P3.17@15.18,48.32 P3.17 15.2,47.348 ; v1(15.348,47.2) 15.2,47.348
  Bottom Layer w0.125: U5.32 10.15,35.843 11.493,34.5 15.961,34.5 17.55,36.089 17.55,45.046 v1@15.348,47.248 ; v1(15.348,47.2) v1@15.348,47.248 ; P4.10 15.5,53.818 15.5,53.2 16.1,52.6 16.1,49.9 16.039,49.839 16.039,49.706 15.348,49.016 v1@15.348,47.248
E17: P3.35 P4.7 U4.40 U5.33 | length 42.5
  Top Layer w0.125: U4.40 16.596,40.05 19.15,42.604 19.15,43.85 16.1,46.9 v1@16.1,47.3 ; P3.35 15.2,50.2 15.4,50.4 16,50.4 16.3,50.1 16.3,47.5 v1@16.1,47.3 ; v1(16.2,47.3) v1@16.1,47.3
  Bottom Layer w0.125: U5.33 9.65,35.989 11.389,34.25 16.064,34.25 17.8,35.986 17.8,45.2 16.2,46.8 v1(16.2,47.3) 16.2,49 16.6,49.4 16.6,50.66 P4.7
E18: P3.34 P4.8 U4.39 U5.34 | length 48
  Top Layer w0.125: P3.34 14.56,50.26 14.95,50.65 16.104,50.65 16.8,49.954 v1(16.8,46.8) 16.8,46.554 19.4,43.954 19.4,42.5 16.45,39.55 U4.39
  Bottom Layer w0.125: U5.34 9.15,36.136 11.286,34 16.168,34 18.05,35.882 18.05,45.55 v1(16.8,46.8) 16.8,49.198 17.309,49.706 17.309,51.902 17.3,51.911 17.3,52.6 16.9,53 16.9,53.688 P4.8
E19: P3.20 P4.26 U4.25 U5.48 | length 31.3
  Top Layer w0.125: v1@5.2,44.1 3.5,45.8 3.5,49.3 4.5,50.3 5.3,50.3 5.6,50 P3.20 ; v1(5.25,44.05) 5.25,43.35 4.95,43.05 4.95,37.65 5.4,37.2 U4.25
  Bottom Layer w0.125: P4.26 5.4,53.758 5.4,53.1 5,53.1 5.879,52.221 5.879,49.706 5.25,49.078 v1(5.25,44.05) U5.48
E20: P3.21 P4.25 U4.26 U5.47 | length 32.3
  Top Layer w0.125: P3.21@6.22,49.6 6.22,50.08 5.75,50.55 4.35,50.55 3.25,49.45 3.25,44.943 v1(4.7,43.493) 4.7,37.3 6.1,35.9 8.5,35.9 8.7,36.1 U4.26
  Bottom Layer w0.125: P4.25 5.3,50.79 5.3,49.5 4.7,48.9 v1(4.7,43.493) 6.743,43.493 U5.47
E21: P3.22 P4.28 U4.27 U5.46 | length 38.6
  Top Layer w0.125: P3.22@6.86,49.6 6.86,50.16 6.22,50.8 4.1,50.8 3,49.7 3,44.2 v1(4.3,42.9) 4.3,37.346 5.996,35.65 8.604,35.65 9.2,36.246 U4.27
  Bottom Layer w0.125: P4.28 4.2,53.688 4.2,53 4.6,52.6 4.6,51.911 4.609,51.902 4.609,49.509 4.3,49.2 v1(4.3,42.9) ; v1@4.35,43.05 U5.46
E22: P3.23 P4.27 U4.28 U5.45 | length 39.2
  Top Layer w0.125: P3.23@7.5,49.6 7.5,50.3 6.75,51.05 3.65,51.05 2.75,50.15 2.75,43.45 v1(3.9,42.3) 3.9,37.3 5.8,35.4 9.2,35.4 9.7,35.9 U4.28
  Bottom Layer w0.125: P4.27 4.1,50.74 4.1,49.5 3.9,49.3 v1(3.9,42.3) 4.126,42.526 4.139,42.512 6.762,42.512 U5.45
E23: P3.24 P4.29 U4.29 U5.40 | length 47
  Top Layer w0.125: P3.24@8.14,49.6 8.14,50.16 7,51.3 3.546,51.3 2.5,50.254 2.5,41.155 3.5,40.155 v1(3.5,40.1) 3.5,37.346 5.746,35.1 9.4,35.1 10.2,35.9 U4.29
  Bottom Layer w0.125: P4.29 2.7,50.73 2.7,49.4 1.1,47.8 1.1,40.5 2.013,39.587 2.336,39.587 2.848,40.1 v1(3.5,40.1) 6.75,40.1 U5.40
E24: P3.25 P4.30 U4.30 U5.39 | length 52.8
  Top Layer w0.125: P3.25@8.78,49.6 8.78,50.28 7.51,51.55 3.443,51.55 2.25,50.357 2.25,41.052 2.813,40.489 2.813,39.787 v1(3.1,39.5) 3.1,37.3 5.6,34.8 9.6,34.8 10.7,35.9 U4.30
  Bottom Layer w0.125: P4.30 2.7,53.778 2.7,53 2.1,52.4 2.1,49.154 0.85,47.904 0.85,40.396 1.909,39.337 2.937,39.337 v1(3.1,39.5) 3.15,39.55 U5.39
E25: P3.26 P4.31 U4.31 U5.38 | length 52
  Top Layer w0.125: P3.26@9.42,49.6 9.42,50.38 8,51.8 3.339,51.8 2,50.461 2,40.948 2.563,40.386 2.563,38.937 v1(2.6,38.9) 2.6,37.446 5.546,34.5 9.7,34.5 11.2,36 U4.31
  Bottom Layer w0.125: P4.31 1.4,50.7 1.4,48.807 0.6,48.007 0.6,40.293 1.805,39.087 2.413,39.087 v1(2.6,38.9) 2.75,39.05 U5.38
E26: P3.27 P4.32 U4.32 U5.37 | length 66.6
  Top Layer w0.125: v1(8.2,38.6) 11.4,38.6 11.7,38.3 U4.32 11.7,35.5 12.1,35.1 18.309,35.1 21.5,38.291 21.5,49.4 18.5,52.4 10.9,52.4 10.06,51.56 P3.27@10.06,49.6
  Bottom Layer w0.125: P4.32 1.5,53 0.35,51.85 0.35,40.189 2.027,38.512 6.762,38.512 U5.37 6.85,38.5 6.95,38.6 v1(8.2,38.6)
E27: P3.28 P4.2 U4.33 U5.28 | length 43.8
  Top Layer w0.125: P3.28@10.7,49.6 10.7,50.2 12.65,52.15 18.396,52.15 21.1,49.446 v1(21.1,47.6) 21.1,38.245 18.255,35.4 12.5,35.4 v1(12.2,35.7) U4.33
  Bottom Layer w0.125: U5.28 12.15,35.75 v1(12.2,35.7) ; P4.2 20.55,53.25 21.119,52.681 21.119,47.619 v1(21.1,47.6)
E28: P3.29 P4.1 U4.34 U5.27 | length 36.6
  Top Layer w0.125: P3.29@11.34,49.6 11.34,50.24 13,51.9 18.293,51.9 20.65,49.543 v1(20.65,48.9) 20.65,38.148 18.152,35.65 13.15,35.65 v1(12.9,35.9) 12.7,36.1 U4.34
  Bottom Layer w0.125: U5.27 12.65,36.15 v1(12.9,35.9) ; P4.1 20.6,50.75 20.6,49.95 20.65,49.9 v1(20.65,48.9)
E29: P3.30 P4.4 U4.35 U5.26 | length 39.2
  Top Layer w0.125: P3.30@11.98,49.6 11.98,50.18 13.45,51.65 18.189,51.65 20.2,49.639 v1(20.2,48.2) 20.2,44.568 20.4,44.368 20.4,38.252 18.248,36.1 v1(14.6,36.1) 13.4,36.1 13.2,36.3 U4.35
  Bottom Layer w0.125: U5.26 13.15,36.35 13.4,36.1 v1(14.6,36.1) ; P4.4 19.3,53.828 19.3,53.2 19.849,52.651 19.849,48.951 20.2,48.6 v1(20.2,48.2)
E30: P3.31 P4.3 U4.36 U5.25 | length 29.8
  Top Layer w0.125: P3.31@12.62,49.6 12.62,50.22 13.8,51.4 18.086,51.4 19.8,49.686 v1(19.8,47.4) 19.8,44.614 20.15,44.264 20.15,42.189 15.161,37.2 v1(14.6,37.2) U4.36
  Bottom Layer w0.125: U5.25 v1(14.6,37.2) ; P4.3 19.2,50.72 19.2,48 v1(19.8,47.4)
E31: P3.32 P4.6 U4.37 U5.35 | length 37.3
  Top Layer w0.125: P3.32@13.26,49.6 13.3,49.64 13.3,50.3 14.15,51.15 17.982,51.15 19.3,49.832 v1(19.3,46.3) 19.3,44.761 19.9,44.161 19.9,42.293 16.157,38.55 U4.37 13.55,38.55 v1(13.5,38.5)
  Bottom Layer w0.125: U5.35 8.65,37.95 9,38.3 13.3,38.3 v1(13.5,38.5) ; P4.6 18.1,53.758 18.1,53.1 18.6,52.6 18.6,47.6 19.3,46.9 v1(19.3,46.3)
E32: P3.33 P4.5 U4.38 U5.36 | length 33.6
  Top Layer w0.125: v1(13.1,39) 13.15,39.05 U4.38 16.304,39.05 19.65,42.396 19.65,44.057 18.7,45.007 v1(18.7,45.7) 18.7,50.079 17.879,50.9 14.6,50.9 13.9,50.2 P3.33@13.9,49.6
  Bottom Layer w0.125: U5.36 8.15,37.852 8.848,38.55 12.65,38.55 v1(13.1,39) ; P4.5 17.9,50.69 17.9,46.5 v1(18.7,45.7)
GND: C1.1 C4.1 C5.1 C6.1 C7.1 C8.1 C9.1 C10.1 C11.1 C13.1 C14.1 DS1.2 G.1 P2.2 P5.8 R4.1 R5.1 U2.4 U2.9 U4.23 U4.24 U5.23 U5.24 U5.43 U6.3 U7.2 U7.4 | length 42.4
  Top Layer w0.2: v2(4.8,12.7) 5.3,12.2 U2.9 ; v1(6.3,4.9) U2.4 ; U4.24 U4.23 7.85,39.05 v1(8.1,39.3) ; C8.1 v1(12,23.9) ; R4.1 19.2,17.9 v2(19.6,18.3) ; v3(19,26) P2.2
  Top Layer w0.254: C4.1 v2(3.2,11.7) ; C1.1 6.9,15.3 v2(6.9,16.2) ; v2(9.55,9.95) U7.4 12.14,9 U7.2 ; C9.1 10.6,15.6 v2(11,16) ; v2(10.2,6.1) C14.1
  Top Layer w0.5: v3(1.34,1.06) P5.8 ; v2(4.1,23.9) DS1.2
  Bottom Layer w0.2: v1(6.3,4.9) 6.5,5.1 C5.1 C6.1 C7.1 ; U5.43 8.35,41.55 v1(8.4,41.5) ; v2(8.2,23.7) C10.1 ; v2(11,16) 11.1,16.1 C11.1 ; v1(13.4,39.6) 13.95,39.05 U5.23 U5.24 ; v2(17.235,11.735) U6.3
  Bottom Layer w0.254: v2@10.8,16.2 v2(11,16) ; v2(15.5,5.7) C13.1 ; v2(16.6,21.3) R5.1@16.6,22.9
I_OUT+: P1.1 P1.3 P1.5 P1.7 P2.1 R12.2 U4.43 | length 34.3
  Top Layer w0.254: U4.43 15.95,41.55 v1(16.3,41.2) ; v1(16.3,37.1) v1(18.7,37.1)
  Bottom Layer w0.254: R12.2 7.2,27.5 5.7,29 5.7,31.28 7.32,32.9 14.94,32.9 17.2,30.64 P2.1 18.7,30.94 v1(18.7,37.1) ; v1(16.3,37.1) v1(16.3,41.2)
NetC1_2: C1.2 R3.2 U1.3 | length 5
  Top Layer w0.2: C1.2 5.3,16.5 R3.2
  Top Layer w0.254: R3.2 7.265,18.465 U1.3
NetC2_1: C2.1 C3.1 U1.1 U1.2 | length 12.4
  Top Layer w0.2: C3.1 7.97,20.9 U1.1 U1.2 ; 14,14.7 15.3,14.7 C2.1
  Top Layer w0.254: U1.2 8.965,19.735 14,14.7
NetC2_2: C2.2 R4.2 U1.5 | length 4
  Top Layer w0.2: U1.5 14.995,17.195 R4.2@15.4,17.6 ; C2.2 R4.2@15.4,17.6 ; R4.2@15.5,17.7 R4.2@15.4,17.6
NetC3_2: C3.2 R2.2 R3.1 | length 4.5
  Top Layer w0.2: R2.2@3.6,18.2 R3.1@5.6,18.2 ; C3.2@4.9,21 C3.2@5,21
  Top Layer w0.254: C3.2@5,20.648 5,19.1 R3.1@5.6,18.5
NetC4_2: C4.2 U2.3 | length 4.3
  Top Layer w0.2: C4.2 5.1,8.8 5.8,8.1 U2.3
NetC12_1: C12.1 U6.4 | length 3.1
  Bottom Layer w0.254: C12.1 18.505,16.195 U6.4
NetC12_2: C12.2 U6.2 | length 3.3
  Bottom Layer w0.254: U6.2 15.965,15.865 C12.2
NetDS1_1: DS1.1 R13.1 | length 1.7
  Top Layer w0.5: DS1.1 R13.1 R13.1@4.1,28.3
NetP1_2: P1.2 R7.1 | length 1.6
  Top Layer w0.2: R7.1 P1.2@15.3,29.84
NetP1_4: P1.4 R8.2 | length 1.9
  Top Layer w0.2: R8.2 P1.4@12.6,30.1
NetP1_6: P1.6 R9.2 | length 1.7
  Top Layer w0.2: R9.2 9.8,29.84 P1.6@9.83,29.87
NetP1_8: P1.8 R10.2 | length 1.9
  Top Layer w0.254: R10.2 7,30.04 P1.8@7.06,30.1
NetR5_2: R5.2 R6.1 U3.2 | length 8
  Bottom Layer w0.254: U3.2 13.635,21.635 R5.2 14.6,23.2 R6.1
NetR6_2: R6.2 R7.2 R8.1 R9.1 R10.1 U3.1 | length 15.1
  Top Layer w0.254: R10.1 R9.1 R8.1@12.27,26.2 ; R9.1@9.44,26.6 R9.1@9.57,26.47 ; v2(12.6,24.6) 12.27,24.93 R8.1@12.27,26.2 ; R7.2@14.83,26.47 R7.2@14.9,26.4 ; R7.2 R8.1 R8.1@12.27,26.2
  Bottom Layer w0.254: U3.1 12.6,23.38 v2(12.6,24.6) R6.2
NetR11_2: R11.2 R12.1 U3.3 | length 11.8
  Bottom Layer w0.254: R12.1 9.7,21.7 11.035,20.365 U3.3 14.235,20.365 R11.2
NetR14_2: R14.2 U7.3 | length 3
  Top Layer w0.254: U7.3 13.86,10 R14.2
SPI_FSYNC: FSYNC.1 P5.7 R1.1 U2.8 | length 19.5
  Top Layer w0.2: FSYNC.1 2.4,4.6 P5.7@3.48,3.52 ; v1(4.8,13.7) 5.284,13.7 5.827,13.157 5.827,10.927 U2.8
  Bottom Layer w0.2: FSYNC.1 2.9,13.7 v1(4.8,13.7) ; R1.1 2.6,4.56 P5.7
SPI_SCLK: P5.5 SCLK.1 U2.7 U4.19 U5.19 | length 57.6
  Top Layer w0.2: v1(2.175,39.975) 2.175,34.226 2.525,33.876 2.525,33.324 2.2,32.999 2.2,21.6 ; v1(2.2,15.7) 2.2,21.6 ; SCLK.1 2.2,21.6 ; v1(5.5,40.6) 5.95,41.05 U4.19 8.65,41.05 v1(8.7,41) ; U2.7 v1(6.3,13.2)
  Bottom Layer w0.2: v1(2.175,39.975) 2.8,40.6 v1(5.5,40.6) ; v1(2.2,15.7) 3.6,14.3 5.2,14.3 v1(6.3,13.2) 6.7,13.2 7.7,12.2 7.7,5.2 P5.5 ; v1(8.7,41) 14.95,41 U5.19
SPI_SDATA: P5.3 SDAT.1 U2.6 U4.18 U5.18 | length 59.3
  Top Layer w0.2: v1(1.75,40.65) 1.75,34.05 2.1,33.7 v1(2.1,33.5) ; v1(5.5,41.4) 5.65,41.55 U4.18 7.75,41.55 8.2,42 8.9,42 v1(9.35,41.55) ; U2.6 6.8,12.3 v1(8,13.5)
  Bottom Layer w0.2: v1(1.75,40.65) 2.2,41.1 5.2,41.1 v1(5.5,41.4) ; SDAT.1 3.1,34.5 v1(2.1,33.5) 1.9,33.5 1.8,33.4 1.8,19.7 v1(8,13.5) 8.2,13.3 8.2,4.04 P5.3 ; v1(9.35,41.55) U5.18
SYNC1: P5.6 U4.17 | length 50.4
  Top Layer w0.2: v1(1.5,41.5) 0.8,40.8 0.8,3.1 1.6,2.3 4.86,2.3 P5.6 ; v1(5.4,42) 5.45,42.05 U4.17
  Bottom Layer w0.2: v1(1.5,41.5) 4.9,41.5 v1(5.4,42)
SYNC2: P5.4 U5.17 | length 60.1
  Top Layer w0.2: P5.4 9.78,2.2 12,2.2 13.3,0.9 19.8,0.9 21,2.1 21,34 v1(20.975,34.025) ; v1(16.35,42.05) 17.4,43.1 v1(18.6,43.1)
  Bottom Layer w0.2: U5.17 v1(16.35,42.05) ; v1(18.6,43.1) 18.6,39 20.975,36.625 v1(20.975,34.025) v1@20.85,33.9
V+: C5.2 C6.2 C7.2 C8.2 C10.2 C14.2 P5.1 R1.2 R13.2 R14.1 U1.8 U2.2 U3.8 U4.13 U4.14 U5.13 U5.14 U6.8 U7.1 V+.1 | length 35.4
  Top Layer w0.2: v1(5.3,4.9) U2.2 ; U4.14 7.95,43.55 v1(8.45,44.05) U4.13 ; 13.81,6.71 13.825,6.695 v2(14.695,6.695)
  Top Layer w0.254: C14.2 13.81,6.71 U7.1 13.86,8 R14.1 ; C8.2 13.325,22.525 U1.8 v2(14.895,21.005)
  Top Layer w0.5: R13.2@4.1,29.7 v2(4.1,31.1) ; P5.1 v3(13,3.6)
  Bottom Layer w0.2: R1.2 2.9,8.7 C6.2 ; C7.2 C6.2 ; v1(5.3,4.9) 5.3,7.1 C5.2 C6.2 ; U5.14 13.85,43.55 v1(13.35,44.05) U5.13
  Bottom Layer w0.254: v2(5.005,22.905) U3.8 6.875,24.925 C10.2
  Bottom Layer w0.5: v2(14.695,6.695) U6.8
V-: C9.2 C11.2 C13.2 U1.4 U3.4 U6.5 V-.1 | length 30.6
  Top Layer w0.254: U1.4 8.3,16.97 C9.2
  Top Layer w0.5: U1.4 v3(9.895,17.195)
  Bottom Layer w0.2: V-.1@14.7,3 15.7,4 16.1,4.3 17.1,4.3 C13.2
  Bottom Layer w0.254: C11.2 12.125,17.575 U3.4 U3.4@12.2,19.02 ; C13.2 18.505,5.705 U6.5
  Bottom Layer w0.5: C11.2 10.2,17.5 v3(9.895,17.195) 9.895,13.905 13,10.8 18,10.8 18.505,10.295 U6.5
pads on no net: P3.1 P3.18 P3.19 P3.36 P5.2 U2.1 U3.5 U3.6 U3.7 U4.15 U4.16 U4.20 U4.21 U4.22 U4.41 U4.42 U4.44 U5.15 U5.16 U5.20 U5.21 U5.22 U5.41 U5.42 U5.44 U6.1 U6.6 U6.7
copper on no net: | length 0.1
  Top Layer w0.2: 6.9,13.5 6.9,13.577

## Polygon pours and split planes (outlines as drawn)
GND on Ground Plane (split plane): 21.59,54.79 21.59,0.51 0.51,0.51 0.51,54.79
V+ on Power Plane (split plane): 21.59,54.79 21.59,0.51 0.51,0.51 0.51,54.79

## Silkscreen, mask and mechanical layers (free items; w line width, h text height)
Top Overlay:
  text "21" at 3,45.2 h1.52
  text "22" at 3,42.7 h1.52

## Text inside footprints (layer, text, board x,y; h text height)
P1: Top Overlay "8" at 5.776,30.908 h1.27 r180; Top Overlay "7" at 5.776,33.448 h1.27 r180; Top Overlay "1" at 16.952,33.448 h1.27 r180; Top Overlay "2" at 17.46,30.908 h1.27 r180
P4: Mechanical 1 "J1" at 10.887,56.134 h0.76
P5: Top Overlay "2" at 13.72,1.568 h1.27 r180; Top Overlay "1" at 13.212,4.108 h1.27 r180; Top Overlay "7" at 2.036,4.108 h1.27 r180; Top Overlay "8" at 2.036,1.568 h1.27 r180